# EAGLE board routev2.4 (EAGLE 8.6.0)
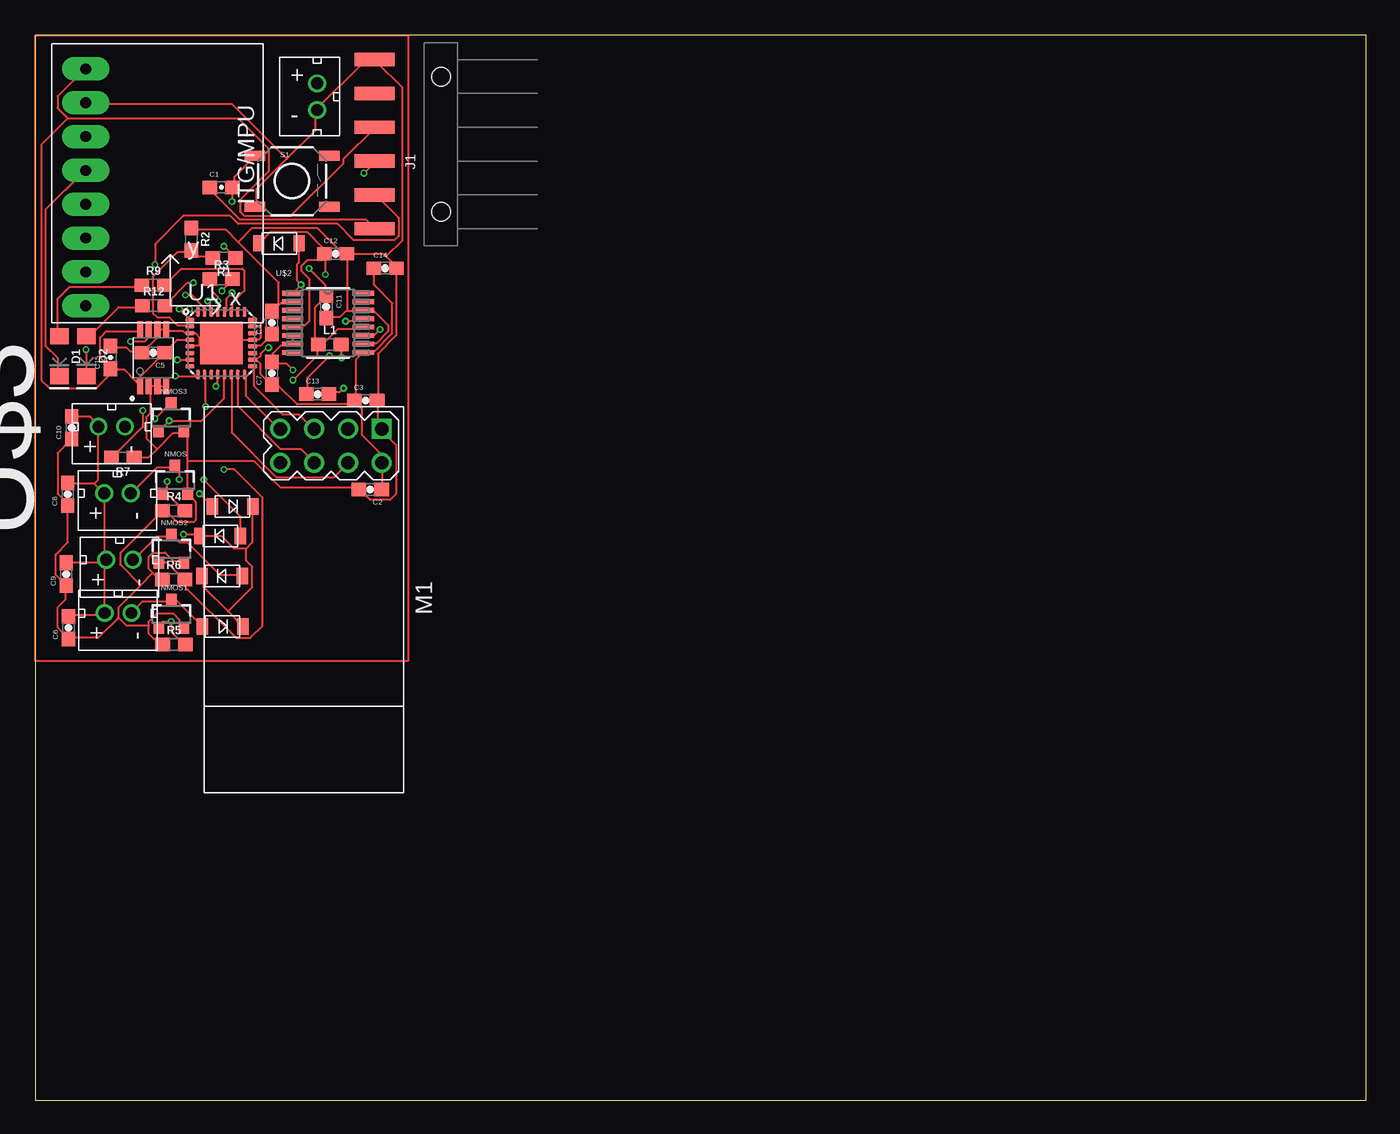
[diagram p0: board, top side]
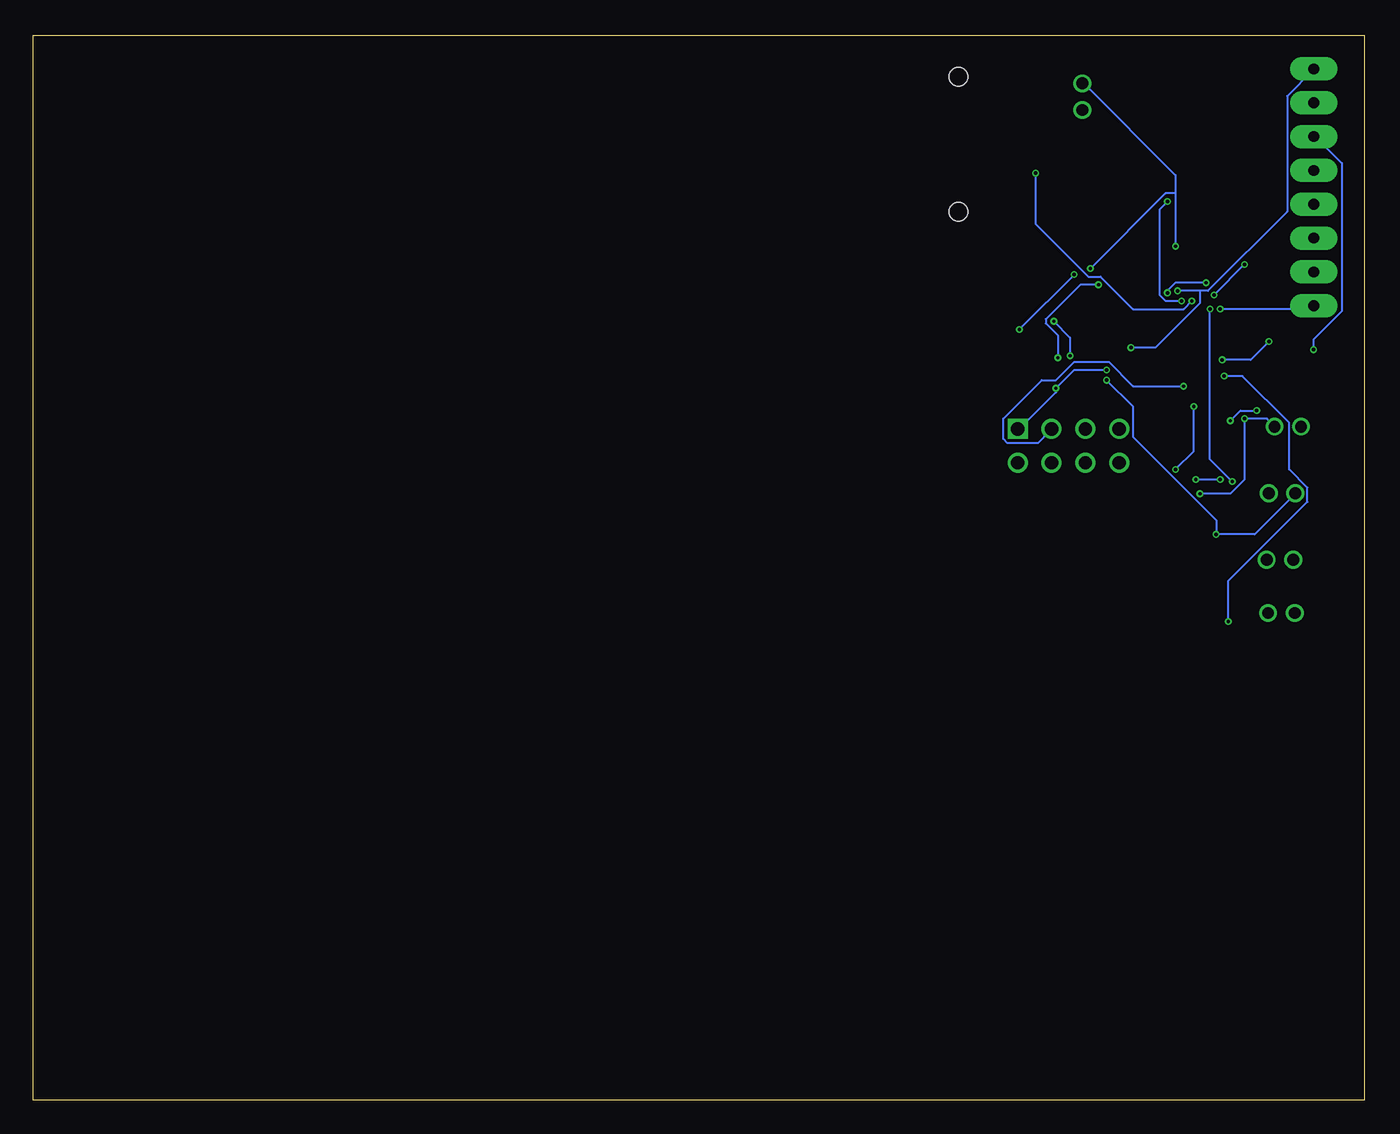
[diagram p1: board, bottom side, seen from below]

Size 100 x 80 mm. Coordinates in mm from the lower left corner, seen from the top.
Outline: 0,0 100,0 100,80 0,80 0,0
Copper layers (1*16): Top 0.035559375mm / dielectric 1.6mm / Bottom 0.035559375mm
Design rules "oshpark-2layer": minimum track width 6mil, minimum drill 10mil, track to track 6mil, track to pad 6mil, pad to pad 6mil, via to via 6mil, smd to smd 6mil, copper to edge 15mil, drill to drill 6mil, minimum pad ring 5mil, minimum via ring 5mil, stop-mask expansion 2.5mil, vias tented up to drill 0mil, thermal gap 10mil

## Footprints (pad centres in the part's own frame; a part is rotated, then mirrored left to right if it is on the bottom)
0603-CAP = smd 1.1 x 1: 1 -0.85,0; 2 0.85,0
LED-1206 = smd 1.2 x 1.4: A -1.5,0; C 1.5,0
MINI2-F3-B = smd 1.22 x 0.85: NEG 0,1.55; POS 0,-1.5
FTDI_DEVICE_RA_SMT = smd 1 x 3: 1 -6.35,5; 2 -3.81,5; 3 -1.27,5; 4 1.27,5; 5 3.81,5; 6 6.35,5 | hole 1.4: -5.08,0; 5.08,0
0603 = smd 1.1 x 1: 1 -0.85,0; 2 0.85,0
WIRELESS-NRF24L01 = drill 1 square: 1 -12.7,6.35 | drill 1: 2 -10.16,6.35; 3 -12.7,3.81; 4 -10.16,3.81; 5 -12.7,1.27; 6 -10.16,1.27; 7 -12.7,-1.27; 8 -10.16,-1.27
JST_CONNECTOR_FEMALE = drill 0.889: + 0,1; - 0,-1
SOT23-3 = smd 0.8 x 0.9: 1 -0.95,-1; 2 0.95,-1; 3 0,1.1
TACTILE-SWITCH-SMD = smd 1.524 x 0.762: 1 -2.794,1.905; 2 2.794,1.905; 3 -2.794,-1.905; 4 2.794,-1.905
MLF32-PAD = smd 0.7 x 0.3: 1 -2.35,1.75; 2 -2.35,1.25; 3 -2.35,0.75; 4 -2.35,0.25; 5 -2.35,-0.25; 6 -2.35,-0.75; 7 -2.35,-1.25; 8 -2.35,-1.75; 17 2.35,-1.75; 18 2.35,-1.25; 19 2.35,-0.75; 20 2.35,-0.25; 21 2.35,0.25; 22 2.35,0.75; 23 2.35,1.25; 24 2.35,1.75 | smd 0.3 x 0.7: 9 -1.75,-2.35; 10 -1.25,-2.35; 11 -0.75,-2.35; 12 -0.25,-2.35; 13 0.25,-2.35; 14 0.75,-2.35; 15 1.25,-2.35; 16 1.75,-2.35; 25 1.75,2.35; 26 1.25,2.35; 27 0.75,2.35; 28 0.25,2.35; 29 -0.25,2.35; 30 -0.75,2.35; 31 -1.25,2.35; 32 -1.75,2.35 | smd 3.2 x 3.2: PAD 0,0
GY-521 = drill 0.8 pad 1.778 long: ADO -8.89,-6.35; GND -8.89,6.35; INT -8.89,-8.89; SCL -8.89,3.81; SDA -8.89,1.27; VCC -8.89,8.89; XCL -8.89,-3.81; XDA -8.89,-1.27
21-0055H_16 = smd 1.6 x 0.356: 1 -2.654,2.223; 2 -2.654,1.587; 3 -2.654,0.953; 4 -2.654,0.318; 5 -2.654,-0.318; 6 -2.654,-0.953; 7 -2.654,-1.587; 8 -2.654,-2.223; 9 2.654,-2.223; 10 2.654,-1.587; 11 2.654,-0.953; 12 2.654,-0.318; 13 2.654,0.318; 14 2.654,0.953; 15 2.654,1.587; 16 2.654,2.223
SOP65P490X110-8N = smd 1.25 x 0.46: 1 -2.11,0.975; 2 -2.11,0.325; 3 -2.11,-0.325; 4 -2.11,-0.975; 5 2.11,-0.975; 6 2.11,-0.325; 7 2.11,0.325; 8 2.11,0.975

## Placement (x,y rotation side)
C1  100nF  [0603-CAP]  13.97,68.58 0 top
C2  10uF  [0603-CAP]  25.17,45.89 180 top
C3  100nF  [0603-CAP]  24.83,52.57 0 top
C4  100nF  [0603-CAP]  17.78,58.42 90 top
C5  100nF  [0603-CAP]  8.85,56.16 180 top
C6  100uF  [0603-CAP]  2.49,35.5 90 top
C7  100nF  [0603-CAP]  17.78,54.61 90 top
C8  100uF  [0603-CAP]  2.44,45.53 90 top
C9  100uF  [0603-CAP]  2.33,39.53 90 top
C10  100uF  [0603-CAP]  2.74,50.53 90 top
C11  100uF  [0603-CAP]  21.86,59.63 270 top
C12  100uF  [0603-CAP]  22.56,63.59 0 top
C13  0.1uF  [0603-CAP]  21.21,53.05 0 top
C14  4.7uF  [0603-CAP]  26.29,62.51 0 top
C15  100nF  [0603-CAP]  5.65,55.81 90 top
D1  Yellow  [LED-1206]  1.81,55.88 270 top
D2  Yellow  [LED-1206]  3.85,55.91 270 top
DIODE  DB2W40300L  [MINI2-F3-B]  13.9,42.39 90 top
DIODE1  DB2W40300L  [MINI2-F3-B]  14.05,35.61 270 top
DIODE2  DB2W40300L  [MINI2-F3-B]  14.06,39.39 90 top
DIODE3  DB2W40300L  [MINI2-F3-B]  14.8,44.61 270 top
DIODE4  DB2W40300L  [MINI2-F3-B]  18.33,64.37 90 top
J1  FTDI_DEVICERA_SMT  [FTDI_DEVICE_RA_SMT]  30.48,71.82 90 top
L1  10uH  [0603]  22.13,56.78 0 top
M1  WIRELESS-NRF24L01  [WIRELESS-NRF24L01]  19.68,37.74 270 top
MOTOR  JST_CONNECTOR_FEMALE  [JST_CONNECTOR_FEMALE]  6.17,45.61 90 top
MOTOR1  JST_CONNECTOR_FEMALE  [JST_CONNECTOR_FEMALE]  6.22,36.61 90 top
MOTOR2  JST_CONNECTOR_FEMALE  [JST_CONNECTOR_FEMALE]  6.33,40.61 90 top
MOTOR3  JST_CONNECTOR_FEMALE  [JST_CONNECTOR_FEMALE]  5.74,50.61 90 top
NMOS  N-CHANNEL-MOSFET-IRLML6244TRPBF  [SOT23-3]  10.5,46.56 0 top
NMOS1  N-CHANNEL-MOSFET-IRLML6244TRPBF  [SOT23-3]  10.23,36.51 0 top
NMOS2  N-CHANNEL-MOSFET-IRLML6244TRPBF  [SOT23-3]  10.23,41.4 0 top
NMOS3  N-CHANNEL-MOSFET-IRLML6244TRPBF  [SOT23-3]  10.2,51.26 0 top
R1  2.2k  [0603]  14.19,63.28 180 top
R2  2.2k  [0603]  11.72,64.68 270 top
R3  10k  [0603]  13.97,61.69 0 top
R4  10k  [0603]  10.39,44.29 0 top
R5  10k  [0603]  10.42,34.24 0 top
R6  10k  [0603]  10.39,39.13 0 top
R7  10k  [0603]  6.58,48.28 180 top
R9  1k  [0603]  8.86,61.23 0 top
R12  1k  [0603]  8.89,59.69 0 top
S1  SWITCH-MOMENTARY-2SMD  [TACTILE-SWITCH-SMD]  19.29,69.04 0 top
U1  3.3V  [MLF32-PAD]  13.97,56.88 0 top
U2  GY-521MPU6050  [GY-521]  12.67,68.58 0 top
U$1  JST_CONNECTOR_FEMALE  [JST_CONNECTOR_FEMALE]  21.17,75.39 0 top
U$2  MAX1672'MAX1672'  [21-0055H_16]  21.99,58.4 0 top
U$3  LTC6930CMS8-8.19LTC6930CMS8-8.19  [SOP65P490X110-8N]  8.85,55.77 90 top

## Library data of the parts
C1 C15 = SparkFun-Capacitors; PROD_ID: CAP-00810
C2-C14 = SparkFun-Passives
D1 D2 = SparkFun-LED; PROD_ID: DIO-09909
DIODE DIODE1-DIODE4 M1 MOTOR MOTOR1-MOTOR3 U2 U$1 = quad
J1 = quad; PROD_ID: CONN-08971
L1 = SparkFun-Coils; PROD_ID: NDUC-07874
NMOS NMOS1-NMOS3 = quad; DATASHEET: http://www.mouser.com/ds/2/196/irlml6244pbf-936666.pdf; MOUSER: 942-IRLML6244TRPBF; URL: http://www.mouser.com/Search/ProductDetail.aspx?R=IRLML6244TRPBFvirtualkey57370000virtualkey942-IRLML6244TRPBF
R1-R7 R9 R12 = SparkFun-Resistors; PROD_ID: RES-08272
S1 = quad; PROD_ID: SWCH-08247
U1 = SparkFun-DigitalIC
U$2 = voltreg
U$3 = LTC6390

## Nets
BATTERY+: C6.2 C8.2 C9.2 C10.2 C11.1 DIODE1.NEG DIODE2.NEG DIODE3.NEG DIODE.NEG L1.1 MOTOR1.+ MOTOR2.+ MOTOR3.+ MOTOR.+ R1.1 U$1.+ U$2.12
FTDI-RX: J1.3 U1.30
FTDI-TX: J1.2 U1.31
GND: C2.2 C3.2 C4.2 C5.2 C6.1 C7.2 C8.1 C9.1 C10.1 C11.2 C12.2 C13.2 C14.2 C15.2 J1.6 M1.1 NMOS1.2 NMOS2.2 NMOS3.2 NMOS.2 R2.1 R4.1 R5.1 R6.1 R7.1 S1.3 U1.3 U1.5 U1.21 U1.PAD U2.GND U$1.- U$2.2 U$2.6 U$2.7 U$2.10 U$2.14 U$3.2 U$3.3 U$3.4 U$3.5 U$3.6
IMU-INT: U1.1 U2.INT
IMU-SCL: D2.C U2.SCL
IMU-SDA: D1.C U2.SDA
MEASURE_PIN: R1.2 R2.2 U1.2
MOTOR1: NMOS.1 R4.2 U1.32
MOTOR2: NMOS1.1 R5.2 U1.9
MOTOR3: NMOS2.1 R6.2 U1.10
MOTOR4: NMOS3.1 R7.2 U1.13
N$1: DIODE4.POS L1.2 U$2.1
N$2: C4.1 U1.20
N$3: R9.2 U1.27
N$4: DIODE1.POS MOTOR1.- NMOS1.3
N$5: DIODE2.POS MOTOR2.- NMOS2.3
N$6: DIODE.POS MOTOR.- NMOS.3
N$7: DIODE3.POS MOTOR3.- NMOS3.3
N$8: D1.A R9.1
N$9: D2.A R12.1
N$10: R12.2 U1.28
N$13: C1.1 J1.1
OSC1: U1.7 U$3.7
RESET: C1.2 R3.1 S1.1 U1.29
RF-CE: M1.3 U1.12
RF-CSN: M1.4 U1.14
RF-MISO: M1.7 U1.16
RF-MOSI: M1.6 U1.15
RF-SCK: M1.5 U1.17
VCC: C2.1 C3.1 C5.1 C7.1 C14.1 C15.1 J1.4 M1.2 R3.2 U1.4 U1.18 U2.VCC U$2.9 U$3.1 U$3.8
VR-PS: C12.1 DIODE4.NEG U$2.5 U$2.11
VR-REF: C13.1 U$2.13

## Tracks (layer width: path | path; a pad name or v marks a point on that pad's centre or on a via)
BATTERY+  (via drill 0.25)
  Top 0.152: 15.85,41.45 14.94,41.45 14.02,42.37 12.5,42.37 DIODE.NEG 12.34,42.52 v11.12,42.52 | 15.85,41.45 16.31,41.91 16.31,44.5 DIODE3.NEG | 14.48,36.73 15.54,35.66 DIODE1.NEG | 14.48,36.73 12.65,38.56 12.65,39.32 DIODE2.NEG | 15.85,41.45 15.85,40.54 16.31,40.08 16.31,38.56 14.48,36.73 | C6.2 2.59,36.42 5.03,36.42 5.18,36.58 MOTOR1.+ 5.18,36.73 5.18,40.54 | 5.18,40.54 5.03,40.39 2.44,40.39 C9.2 | 5.18,40.54 MOTOR2.+ 5.18,40.69 5.18,45.57 MOTOR.+ 5.03,45.72 4.42,46.33 | C10.2 2.74,51.36 4.12,51.36 4.72,50.75 MOTOR3.+ 4.72,50.6 4.72,46.63 4.42,46.33 | 4.42,46.33 2.59,46.33 C8.2 | L1.1 21.34,56.84 21.64,56.84 22.71,57.91 24.38,57.91 24.54,58.06 U$2.12 | L1.1 21.18,56.84 21.03,57 21.03,59.59 21.79,60.35 C11.1 21.79,60.5 21.79,61.27 v20.57,62.48 | v14.17,64.16 14.94,63.4 R1.1 | v19.36,54.1 21.18,55.93 21.18,56.69 L1.1
  Bottom 0.152: MOTOR.+ 5.18,45.57 8.23,42.52 v11.12,42.52 11.12,43.59 17.37,49.84 17.37,52.12 v19.36,54.1 | 14.17,68.12 14.17,69.49 21.03,76.35 U$1.+ | 14.17,68.12 v14.17,64.16 | v20.57,62.48 14.94,68.12 14.17,68.12
FTDI-RX  (via drill 0.25)
  Top 0.152: v12.95,60.05 13.11,59.89 13.11,59.28 U1.30 | v24.69,69.65 25.45,70.41 J1.3
  Bottom 0.152: v12.95,60.05 13.56,59.44 17.37,59.44 19.81,61.87 20.73,61.87 24.69,65.84 v24.69,69.65
FTDI-TX  (via drill 0.25)
  Top 0.152: v11.28,60.5 11.73,60.5 12.65,59.59 12.65,59.28 U1.31 | v8.99,62.79 8.99,64.31 11.12,66.45 14.63,66.45 15.24,65.84 22.71,65.84 23.93,64.62 26.98,64.62 27.28,64.92 27.28,66.29 25.6,67.97 J1.2
  Bottom 0.152: v8.99,62.79 v11.28,60.5
GND  (via drill 0.25)
  Top 0.152: 18.9,70.71 21.03,72.85 21.03,74.37 U$1.- 21.18,74.52 24.69,78.03 25.45,78.03 J1.6 25.6,78.03 27.58,76.05 27.58,64.62 26.36,63.4 | 18.9,70.71 16.61,68.43 16.61,67.21 S1.3 | 18.9,70.71 14.78,74.83 3.81,74.83 U2.GND | 8.69,53.65 9.14,53.65 U$3.3 9.3,53.65 9.75,53.65 U$3.4 | 8.69,53.65 8.53,53.65 U$3.2 8.69,53.65 | 9.14,48.92 8.53,48.31 7.47,48.31 R7.1 | 9.14,48.92 10.36,50.14 11.12,50.14 NMOS3.2 11.28,50.14 11.43,49.99 11.43,48.01 | 11.43,48.01 11.43,45.57 NMOS.2 11.58,45.41 12.04,44.96 12.04,43.59 11.89,43.43 10.67,43.43 9.91,44.2 9.6,44.2 R4.1 9.45,44.2 6.4,41.15 6.4,40.23 7.92,38.71 | 8.69,53.65 8.69,51.66 8.38,51.36 8.38,49.68 9.14,48.92 | C10.1 2.59,49.53 1.68,48.62 1.68,45.57 2.44,44.81 C8.1 2.44,44.65 2.44,41.91 1.52,41 1.52,39.47 2.29,38.71 C9.1 2.29,38.56 2.29,37.64 1.68,37.03 1.68,35.51 2.44,34.75 C6.1 2.59,34.75 4.72,34.75 6.25,36.27 | 8.84,39.62 9.45,39.01 R6.1 | 8.84,39.62 8.53,39.93 8.53,40.84 8.84,41.15 9.75,41.15 10.36,40.54 11.12,40.54 NMOS2.2 | 8.53,35.66 8.53,35.05 9.45,34.14 R5.1 | 8.53,35.66 8.53,35.97 9.14,36.58 10.36,36.58 10.82,36.12 10.82,35.97 11.12,35.66 NMOS1.2 | 7.92,38.71 6.25,37.03 6.25,36.27 | 7.92,38.71 8.84,39.62 | 6.25,36.27 6.86,35.66 8.53,35.66 | U$2.6 19.36,57.3 19.36,56.84 U$2.7 19.2,56.69 18.44,56.69 17.83,56.08 17.83,55.47 C7.2 17.83,55.32 18.9,55.32 v19.36,54.86 | v23.16,53.49 22.86,53.19 22.1,53.19 C13.2 | C15.2 5.79,56.54 6.86,56.54 7.16,56.24 7.92,56.24 C5.2 8.08,56.24 9.14,57.3 9.14,57.76 U$3.6 9.3,57.91 9.75,57.91 U$3.5 9.91,57.76 11.12,57.76 11.28,57.61 11.58,57.61 U1.3 11.73,57.61 12.04,57.61 12.34,57.3 12.34,56.69
  Top 0.152: 12.34,56.69 13.72,56.69 13.87,56.84 U1.PAD 14.02,57 14.17,57.15 16.31,57.15 U1.21 16.46,57.15 16.76,57.15 16.92,57.3 16.92,58.37 17.68,59.13 C4.2 17.83,59.28 18.29,59.74 | 12.34,56.69 11.73,56.69 U1.5 | 23.47,63.55 26.21,63.55 26.36,63.4 | 26.36,63.4 27.13,62.64 C14.2 27.13,62.48 27.13,57.45 25.76,56.08 25.76,52.58 C3.2 25.76,52.43 25.76,50.6 25.91,50.44 M1.1 26.06,50.29 27.13,49.23 27.13,45.57 26.67,45.11 25.15,45.11 24.38,45.87 C2.2 24.23,46.02 18.44,46.02 16.46,48.01 11.43,48.01 | 23.47,59.28 24.54,59.28 U$2.14 24.69,59.28 25.45,59.28 26.52,58.22 26.52,57.76 25.6,56.84 24.69,56.84 U$2.10 | 23.47,59.28 23.32,59.28 22.86,58.83 21.95,58.83 C11.2 | 23.47,59.28 23.47,63.55 | 23.47,63.55 C12.2 23.32,63.7 23.01,63.7 21.18,65.53 16.31,65.53 15.24,64.47 | 18.29,59.74 18.44,59.89 19.2,59.89 U$2.2 | 15.24,64.47 18.29,61.42 18.29,59.74 | 15.24,64.47 14.33,65.38 11.73,65.38 R2.1
  Bottom 0.152: M1.1 25.91,50.44 23.16,53.19 v23.16,53.49 21.79,54.86 v19.36,54.86
IMU-INT  (via drill 0.25)
  Top 0.152: v10.82,59.44 11.58,58.67 U1.1
  Bottom 0.152: v10.82,59.44 3.96,59.44 3.81,59.59 U2.INT
IMU-SCL  (via drill 0.25)
  Top 0.152: v3.81,56.39 3.81,54.41 D2.C
  Bottom 0.152: v3.81,56.39 3.81,57.15 1.68,59.28 1.68,70.41 3.66,72.39 U2.SCL
IMU-SDA
  Top 0.152: D1.C 1.68,54.41 1.68,55.78 0.76,56.69 0.76,66.9 3.66,69.8 U2.SDA
MEASURE_PIN
  Top 0.152: U1.2 11.58,58.22 10.67,58.22 10.06,58.83 9.14,58.83 8.84,59.13 8.84,61.87 10.67,63.7 11.58,63.7 R2.2 11.73,63.7 12.04,63.4 13.26,63.4 R1.2
MOTOR1  (via drill 0.25)
  Top 0.152: v11.58,59.44 11.73,59.28 12.19,59.28 U1.32 | v9.91,46.48 9.91,45.87 9.75,45.72 | 9.75,45.72 9.6,45.57 NMOS.1 9.75,45.72 | 9.75,45.72 11.12,44.35 R4.2
  Bottom 0.152: v11.58,59.44 11.58,48.16 v9.91,46.48
MOTOR2  (via drill 0.25)
  Top 0.152: v10.52,54.41 12.19,54.41 U1.9 | NMOS1.1 9.3,35.66 9.6,35.97 v10.21,35.97 10.21,35.2 11.12,34.29 R5.2
  Bottom 0.152: v10.52,54.41 9.14,54.41 5.64,50.9 5.64,47.4 4.27,46.02 4.27,44.96 10.21,39.01 v10.21,35.97
MOTOR3  (via drill 0.25)
  Top 0.152: v12.8,52.12 12.8,54.41 U1.10 | v14.17,47.4 14.94,47.4 17.07,45.26 17.07,35.66 16.15,34.75 15.09,34.75 11.28,38.56 11.28,39.01 R6.2 11.12,39.17 9.91,40.39 9.3,40.39 NMOS2.1
  Bottom 0.152: v12.8,52.12 12.8,48.77 v14.17,47.4
MOTOR4  (via drill 0.25)
  Top 0.152: U1.13 14.17,54.41 14.17,52.73 12.5,51.05 v10.06,51.05 9.3,50.29 NMOS3.1 | v8.08,51.82 8.08,50.6 5.79,48.31 R7.2
  Bottom 0.152: v8.08,51.82 9.3,51.82 v10.06,51.05
N$1  (via drill 0.25)
  Top 0.152: v23.01,55.78 23.01,56.69 L1.2 | U$2.1 19.36,60.66 v19.96,61.27 19.66,61.57 19.66,62.79 19.81,62.94 19.81,64.31 DIODE4.POS
  Bottom 0.152: v23.01,55.78 23.01,57.45 23.93,58.37 23.93,58.67 21.34,61.27 v19.96,61.27
N$2
  Top 0.152: U1.20 16.46,56.69 16.92,56.69 17.68,57.45 C4.1
N$3
  Top 0.152: U1.27 14.78,59.28 14.78,59.89 15.7,60.81 15.7,62.33 15.54,62.48 10.97,62.48 9.75,61.27 R9.2
N$4
  Top 0.152: DIODE1.POS 12.5,35.66 10.67,37.49 10.36,37.49 NMOS1.3 10.21,37.49 8.08,37.49 7.32,36.73 MOTOR1.-
N$5
  Top 0.152: MOTOR2.- 7.47,40.69 9.14,42.37 10.21,42.37 NMOS2.3 10.36,42.37 10.82,41.91 11.43,41.91 13.87,39.47 15.54,39.47 DIODE2.POS
N$6  (via drill 0.25)
  Top 0.152: MOTOR.- 7.32,45.72 9.14,47.55 10.36,47.55 NMOS.3 10.52,47.55 10.82,47.24 v10.82,46.63 | v12.65,46.63 15.39,43.89 15.39,42.52 DIODE.POS
  Bottom 0.152: v10.82,46.63 v12.65,46.63
N$7  (via drill 0.25)
  Top 0.152: v8.99,51.21 10.06,52.27 NMOS3.3 | v12.34,45.57 13.26,44.65 DIODE3.POS
  Bottom 0.152: MOTOR3.- 6.86,50.75 7.32,51.21 v8.99,51.21 8.99,46.63 10.06,45.57 v12.34,45.57
N$8
  Top 0.152: R9.1 7.92,61.11 2.59,61.11 1.68,60.2 1.68,57.45 D1.A
N$9
  Top 0.152: R12.1 7.92,59.59 6.25,59.59 3.96,57.3 D2.A
N$10  (via drill 0.25)
  Top 0.152: v14.78,60.66 14.33,60.2 14.33,59.28 U1.28 | v11.89,61.42 11.43,61.42 9.75,59.74 R12.2
  Bottom 0.152: v14.78,60.66 14.78,60.81 14.17,61.42 v11.89,61.42
N$11
  Top 0.152: 0,80 28,80 28,33 0,33 0,80
N$13
  Top 0.152: C1.1 13.26,68.58 13.26,68.28 15.39,66.14 24.84,66.14 25.45,65.53 J1.1
OSC1  (via drill 0.25)
  Top 0.152: v10.67,55.63 11.58,55.63 U1.7 | v7.16,57 8.23,57 8.38,57.15 8.38,57.76 U$3.7
  Bottom 0.152: v10.67,55.63 8.53,55.63 v7.16,57
RESET  (via drill 0.25)
  Top 0.152: U1.29 13.72,59.28 v13.72,60.05 13.72,60.35 13.26,60.81 13.26,61.57 R3.1 | S1.1 16.46,70.87 14.94,69.34 14.94,68.58 C1.2 14.78,68.58 v14.78,67.51
  Bottom 0.152: v13.72,60.05 14.94,60.05 15.39,60.5 15.39,66.9 v14.78,67.51
RF-CE  (via drill 0.25)
  Top 0.152: v13.56,53.65 13.72,53.8 13.72,54.41 U1.12
  Bottom 0.152: v13.56,53.65 17.37,53.65 19.2,55.47 21.79,55.47 23.16,54.1 24.23,54.1 27.13,51.21 27.13,49.68 26.82,49.38 24.54,49.38 23.62,50.29 M1.3
RF-CSN
  Top 0.152: U1.14 14.78,54.41 14.78,50.14 18.14,46.79 22.4,46.79 23.47,47.85 M1.4
RF-MISO
  Top 0.152: U1.16 15.85,54.41 15.85,52.88 18.29,50.44 M1.7
RF-MOSI
  Top 0.152: U1.15 15.24,54.41 15.24,52.12 18.44,48.92 19.96,48.92 20.88,48.01 M1.6
RF-SCK
  Top 0.152: U1.17 16.46,55.02 16.46,53.65 18.59,51.51 19.81,51.51 20.88,50.44 M1.5
VCC  (via drill 0.25)
  Top 0.152: C2.1 26.06,46.02 26.06,47.85 M1.2 25.91,48.01 25.91,48.62 24.54,49.99 24.54,51.97 24.08,52.43 C3.1 | 16.61,55.63 16.46,55.63 U1.18 16.61,55.63 | 16.61,55.63 16.92,55.32 16.92,54.56 17.68,53.8 C7.1 17.83,53.65 18.29,53.65 19.66,52.27 23.77,52.27 23.93,52.43 C3.1 | C3.1 24.08,52.58 24.08,55.63 24.54,56.08 U$2.9 24.69,56.24 25.45,56.24 26.82,57.61 26.82,59.89 25.45,61.27 25.45,62.48 C14.1 | U1.4 11.58,57.15 10.67,57.15 9.75,56.24 C5.1 9.6,56.08 7.62,54.1 7.47,54.1 | 7.47,54.1 7.77,53.8 U$3.1 | 7.47,54.1 6.71,54.86 5.79,54.86 C15.1 | U$3.8 7.77,57.76 5.33,57.76 4.88,57.3 4.88,55.78 5.64,55.02 C15.1 | v14.02,60.81 14.78,61.57 R3.2 | 2.44,73.76 15.24,73.76 17.53,71.48 17.53,69.8 15.39,67.67 15.39,66.75 15.7,66.45 19.2,66.45 23.16,70.41 23.16,70.71 25.45,73 J1.4 | 2.44,73.76 1.68,74.52 1.68,75.44 3.66,77.42 U2.VCC | 2.44,73.76 0.46,71.78 0.46,54.1 1.07,53.49 4.57,53.49 5.64,54.56 5.64,54.86 C15.1 | 16.61,55.63 16.92,55.93 16.92,56.08 17.37,56.54 v17.53,56.54
  Bottom 0.152: 12.34,60.81 11.73,60.81 5.79,66.75 5.79,75.44 3.81,77.42 U2.VCC | 12.34,60.81 v14.02,60.81 | v17.53,56.54 15.7,56.54 12.34,59.89 12.34,60.81
VR-PS  (via drill 0.25)
  Top 0.152: C12.1 21.64,63.7 21.64,64.01 20.42,65.23 17.68,65.23 16.92,64.47 DIODE4.NEG | v25.91,57.91 25.45,57.45 24.69,57.45 U$2.11 | 21.79,63.09 21.79,63.55 C12.1 | 21.79,63.09 v21.79,62.03 | 21.79,63.09 20.42,63.09 19.96,62.64 19.96,62.33 20.57,61.72 20.57,58.52 20.27,58.22 19.36,58.22 U$2.5 | 21.79,63.09 C12.1
  Bottom 0.152: v21.79,62.03 v25.91,57.91
VR-REF  (via drill 0.25)
  Top 0.152: v22.1,55.93 20.42,54.25 20.42,53.19 C13.1 | v23.32,58.52 24.38,58.52 24.54,58.67 U$2.13
  Bottom 0.152: v22.1,55.93 22.1,57.3 v23.32,58.52